# Altium PCB PCM2706_CODEC.PcbDoc
Units mil, origin at the board's own origin, x right, y up, seen from the top; angles counter-clockwise.
Board outline 1377.95 x 1377.95 mil, 2 copper layers (Top Layer, Bottom Layer); 31 components, 22 nets, 104 pads, 40 vias.
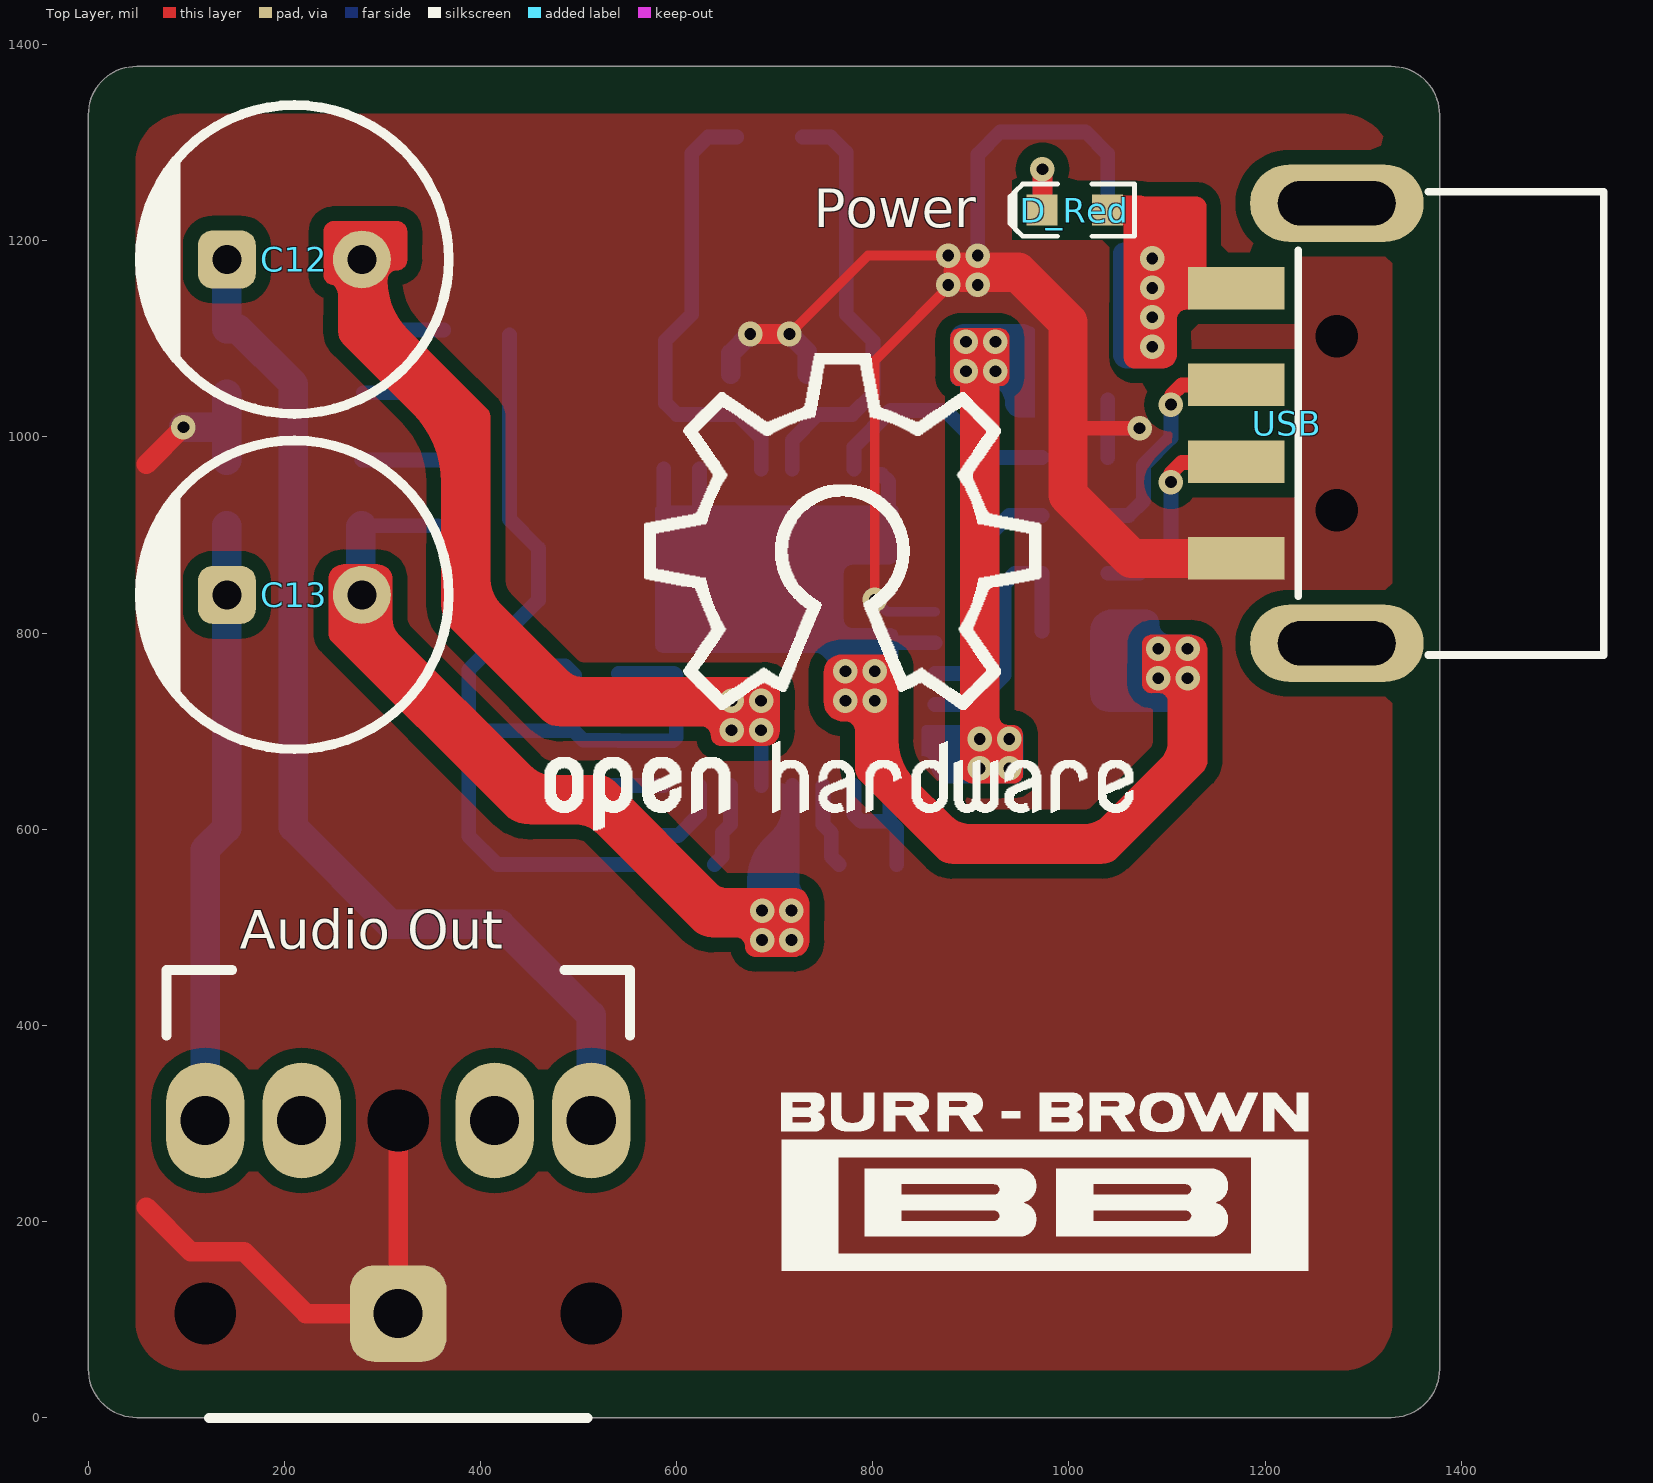
[diagram p0: Top Layer view]
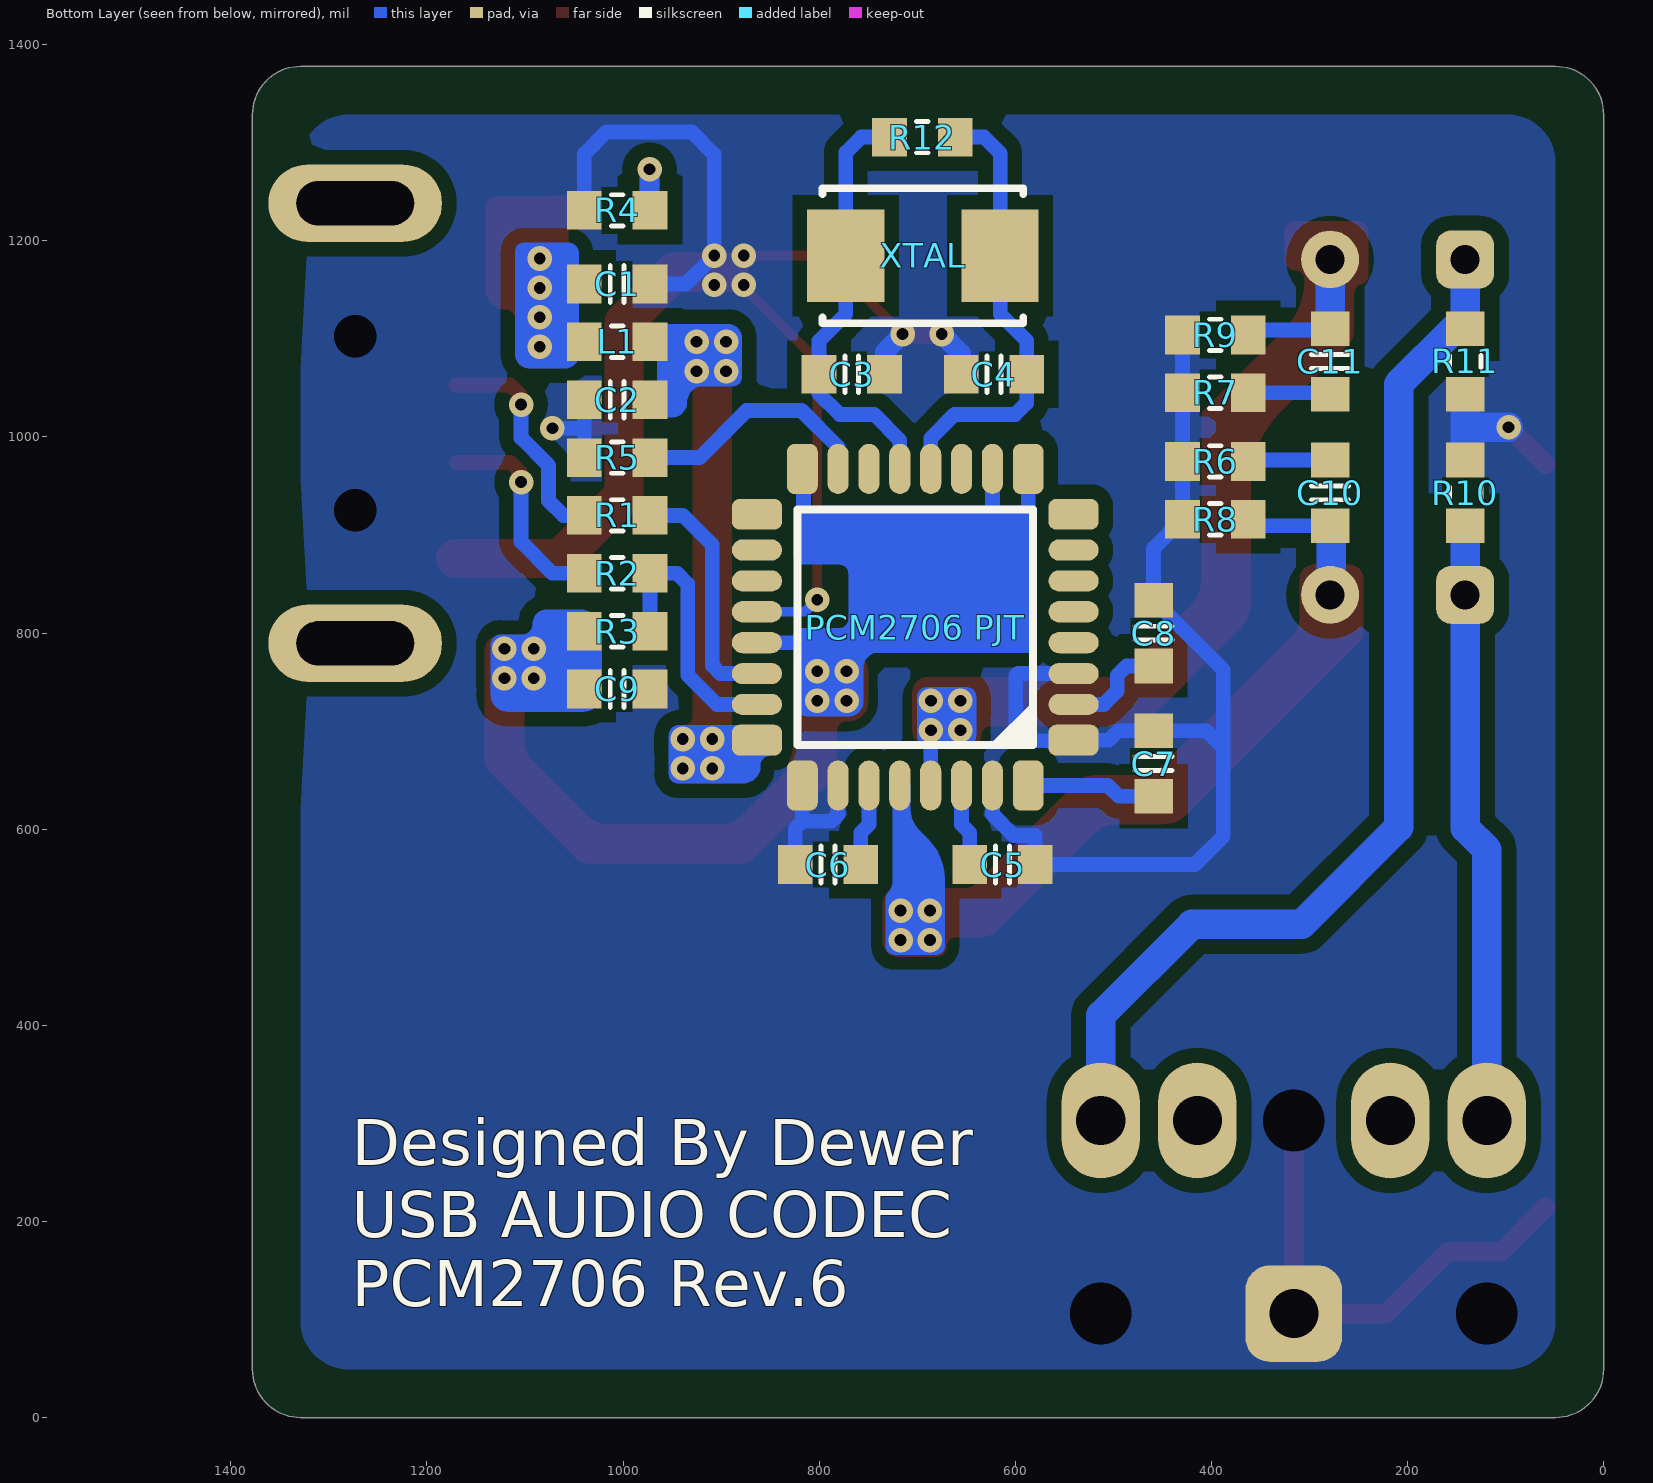
[diagram p1: Bottom Layer view, seen from below]

## Layer stack, top to bottom
Top Layer: signal copper 1.4
Dielectric: dielectric 12.6, FR-4, Dk 4.8
Bottom Layer: signal copper 1.4

## Board outline
1377.95,1328.74 ccw(c1328.74,1328.74) 1328.74,1377.95 49.21,1377.95 ccw(c49.21,1328.74) 0,1328.74 0,49.21 ccw(c49.21,49.21) 49.21,0 1328.74,0 ccw(c1328.74,49.21) 1377.95,49.21

## Design rules (kind name [scope] priority, off if disabled: settings)
Clearance [All] p1: gap=7
PolygonConnect [All] p1: connectstyle=Direct reliefconductorwidth=10 reliefentries=4 polygonreliefangle="90 Angle" airgapwidth=10
RoutingVias [All] p1: holewidth=28 width=50 viastyle="Through Hole" minholewidth=28 minwidth=50 maxholewidth=28 maxwidth=50
SolderMaskExpansion [All] p1: expansion=0
Width [All] p1: maxlimit=40 minlimit=10 preferedwidth=20 minimp=50.000000 maximp=50.000000 favimp=50.000000
28 further rules are at their usual default settings.

## Components (designator, comment, footprint, x,y, rotation, side; value= is the part's Value field where it differs from the comment)
"Audio Out" "Generic 3.5 PhoneJack 5 Pin through-hole" "3.5 PhoneJack 5 Pin" 316,106 r270 top (schematic designator J_Audio_Out)
C1 "Cap_0603" CAP_0603 1006,1156 r0 bottom
C2 "Cap_0603" CAP_0603 1006,1038 r180 bottom
C3 "Cap_0603" CAP_0603 766.75,1063.82 r0 bottom
C4 "Cap_0603" CAP_0603 621.75,1063.82 r180 bottom
C5 "Cap_0603" CAP_0603 613,564 r0 bottom
C6 "Cap_0603" CAP_0603 791,564 r180 bottom
C7 "Cap_0603" CAP_0603 459,667 r270 bottom
C8 "Cap_0603" CAP_0603 459,800 r270 bottom
C9 "Cap_0603" CAP_0603 1006,743 r0 bottom
C10 "Cap_0603" CAP_0603 279,943 r270 bottom
C11 "Cap_0603" CAP_0603 279,1077 r90 bottom
C12 "Capacitor" CAP_ELEC_F3.5_D8_H11.5 279,1181 r180 top
C13 "Capacitor" CAP_ELEC_F3.5_D8_H11.5 279,839 r180 top
D_Red "LED_0603_RED" LED_0603_RED 1005.9,1231.3 r180 top
L1 "Ind_0603" IND_0603 1006,1097 r180 bottom
"PCM2706 PJT" "PCM2706 PJT" TI-S-PQFP-N32 702,806 r0 bottom
R1 "Res_0603" RES_0603 1006,920 r180 bottom
R2 "Res_0603" RES_0603 1006,861 r180 bottom
R3 "Res_0603" RES_0603 1006,802 r180 bottom
R4 "Res_0603" RES_0603 1006,1231 r0 bottom
R5 "Res_0603" RES_0603 1006,979 r0 bottom
R6 "Res_0603" RES_0603 396,975 r0 bottom
R7 "Res_0603" RES_0603 396,1045 r0 bottom
R8 "Res_0603" RES_0603 396,916 r0 bottom
R9 "Res_0603" RES_0603 396,1104 r0 bottom
R10 "Res_0603" RES_0603 141,943 r90 bottom
R11 "Res_0603" RES_0603 141,1077 r270 bottom
R12 "Res_0603" RES_0603 694.75,1305.82 r180 bottom
USB "USB" USB 1379.45,1013.95 r0 top
XTAL "XTAL_5032" XTAL_5032 694.21,1184.82 r0 bottom

## Footprints (in the part's own frame and the unit in brackets; to place one, negate y for a bottom-side part, rotate by r counter-clockwise, add the part's x,y. Pads: shape width x height; smd on the part's side, far side on the other; paste and mask are expansions set on the pad)
"3.5 PhoneJack 5 Pin" [mm] "Generic 3.5 PhoneJack 5 Pin  through-hole"
  round 1 hole 1.6: 0(-5,0) 0(0,5) 0(0,-5)
  oval 3x2.032 hole 1.27: Ring_NC(-5,2.5) Ring_NO(-5,5) Tip_NC(-5,-2.5) Tip_NO(-5,-5)
  rrect50% 2.5x2.5 hole 1.27: Sleeve(0,0)
  silkscreen extent -8.9,-6 2.7,6, body extent -8.48,-6 6.52,6, height 10
CAP_0603 [mm] "Chip Capacitor, Body 1.6x0.8mm, 0603, IPC Medium Density"
  rect 0.9x1 smd: 1(-0.85,0) 2(0.85,0)
  Top Layer pour cut-out: -0.4,0.6 0.4,0.6 0.4,-0.6 -0.4,-0.6
  silkscreen extent -0.18,-0.48 0.18,0.48, body extent -0.85,-0.45 0.85,0.45, height 0.89
CAP_ELEC_F3.5_D8_H11.5 [mm] "CAP_ELEC_F3.5_D8_H11.5"
  round 1.5 hole 0.75: 1(0,0)
  rrect50% 1.5x1.5 hole 0.75: 2(3.5,0)
  silkscreen extent -2.25,-4 5.75,4, body extent -2.27,-4.03 5.78,4.03, height 12.03
IND_0603 [mm] "Chip bead, Body 1.6x0.8mm, 0603, IPC Medium Density"
  rect 0.9x1 smd: 1(-0.85,0) 2(0.85,0)
  Top Layer pour cut-out: -0.4,0.6 0.4,0.6 0.4,-0.6 -0.4,-0.6
  silkscreen extent -0.15,-0.41 0.15,0.41, body extent -0.8,-0.4 0.8,0.4, height 0.79
LED_0603_RED [mm] "Chip Capacitor, 2-Leads, Body 1.6x0.8mm, IPC Medium Density"
  rect 0.8x0.8 smd: 1(-0.85,0) 2(0.85,0)
  Top Layer pour cut-out: -0.5,0.5 0.5,0.5 0.5,-0.5 -0.5,-0.5
  silkscreen extent -1.55,-0.67 1.68,0.67, body extent -0.8,-0.4 0.8,0.4, height 0.75
RES_0603 [mm]
  rect 0.9x1 smd: 1(-0.85,0) 2(0.85,0)
  Top Layer pour cut-out: -0.4,0.6 0.4,0.6 0.4,-0.6 -0.4,-0.6
  silkscreen extent -0.15,-0.41 0.15,0.41, body extent -0.87,-0.47 0.88,0.48, height 0.54
TI-S-PQFP-N32 [mm] "TQFP, 32-Leads, Body 7.00x7.00mm, Pitch 0.80mm, IPC High Density"
  rrect50% 1.3x0.8 smd: 1(-4.1,2.925) 8(-4.1,-2.925) 17(4.1,-2.925) 24(4.1,2.925)
  oval 1.3x0.55 smd: 2(-4.1,2) 3(-4.1,1.2) 4(-4.1,0.4) 5(-4.1,-0.4) 6(-4.1,-1.2) 7(-4.1,-2) 18(4.1,-2) 19(4.1,-1.2) 20(4.1,-0.4) 21(4.1,0.4) 22(4.1,1.2) 23(4.1,2)
  rrect50% 0.8x1.3 smd: 9(-2.925,-4.1) 16(2.925,-4.1) 25(2.925,4.1) 32(-2.925,4.1)
  oval 0.55x1.3 smd: 10(-2,-4.1) 11(-1.2,-4.1) 12(-0.4,-4.1) 13(0.4,-4.1) 14(1.2,-4.1) 15(2,-4.1) 26(2,4.1) 27(1.2,4.1) 28(0.4,4.1) 29(-0.4,4.1) 30(-1.2,4.1) 31(-2,4.1)
  silkscreen extent -3.05,-3.05 3.05,3.05, body extent -4.51,-4.5 4.49,4.5, height 1.6
USB [mm] "Connector; USB1.1, Type A, SM; 4 Position; Right Angle"
  round 0.8 hole 1.1: 0(-2.7,-2.25) 0(-2.7,2.25)
  rect 2.5x1.1 smd: 1(-5.3,3.5) 2(-5.3,1) 3(-5.3,-1) 4(-5.3,-3.5)
  oval 4.5x2 hole 1.143 slot 3.048 at 0 deg: 5(-2.7,-5.7) 6(-2.7,5.7)
  silkscreen extent -3.7,-6 4.21,6, body extent -5.3,-6.3 15,6.31, height 3.15
XTAL_5032 [mm] "Molded Capacitor, 2-Leads, Body 5.0x3.2mm, IPC Medium Density"
  rect 2x2.4 smd: 1(-2,0) 2(2,0)
  silkscreen extent -2.6,-1.75 2.6,1.75, body extent -2.5,-1.6 2.5,1.6, height 1

## Part data
C1 C2 C3 C4 C5 C6 C7 C8 C9 C10 C11: "Capacitor"
C12 C13: library part Cap_ELEC_8*11.5*3.5, "Cap_ELEC_8*11.5*3.5"
D_Red: "LED"
L1: "Inductor"
"PCM2706 PJT": "PCM2706 USB CODEC"
R1 R2 R3 R4 R5 R6 R7 R8 R9 R10 R11 R12: "Resistor"
XTAL: "Crystal Oscillator"

## Via types
v1: diameter 25, hole 12, Top Layer to Bottom Layer, tented both sides, 40 vias

## Nets (pads, with @x,y where several pads share a name; then routed paths per layer and width w, separated by ;. In a path a pad name is that pad's centre, name@x,y a point inside that pad or via, vN(x,y) a via of type N, cw(c..) or ccw(c..) an arc to the next point about the centre after c; other vN are vias at no path point)
5V: C1.2 D_Red.1 L1.1 USB.1 | length 104.1
  Top Layer w30: D_Red.1 1071.7,1231.3 1085,1218 1085,1165
  other v1: 1085,1092 1085,1122 1085,1152 1085,1182
AGND: "Audio Out.0" "Audio Out.Sleeve" "PCM2706 PJT.1" "PCM2706 PJT.3" "PCM2706 PJT.20" "PCM2706 PJT.25" "PCM2706 PJT.26" "PCM2706 PJT.31" C1.1 C2.1 C3.1 C4.1 C5.1 C6.1 C7.1 C8.1 C9.1 R4.2 R5.2 R6.2 R7.2 R8.2 R9.2 R10.2 R11.2 USB.0 USB.4 | length 3856.1
  Top Layer w10: v1(715,1105) 795,1185 v1(877,1185) ; v1(802,834) 802,1078 892,1168
  Top Layer w15: 999,1011 1001,1009 v1(1072,1009)
  Top Layer w20: 59.06,214.57 104.33,169.29 158.71,169.29 222,106 316,106 316,302.85 ; 59.06,972.06 v1(97,1010) ; v1(675,1105) v1(715,1105)
  Top Layer w40: 892,1168 948,1168 999,1117 999,1011 999,941 1063.84,876.16 USB.4
  Bottom Layer w10: v1(802,834) 814.25,821.75 863.42,821.75
  Bottom Layer w15: R9.2 R7.2 R6.2 R8.2 459,886.46 C8.1 388,762.46 388,683 ; 540.58,758.76 596.56,758.76 cw(c596.56,755.91) 599.41,755.91 599.41,694.95 cw(c594.72,694.95) 594.72,690.26 540.58,690.26 540.58,690.84 504.62,690.84 495,700.46 C7.1 405.46,700.46 388,683 ; 623.26,644.58 623.26,615.26 601.54,593.54 579.54,593.54 C5.1 417,564 388,593 388,683 ; 780.74,644.58 780.74,615.26 787.83,608.17 817.16,608.17 817.16,644.58 ; 818.83,606.49 824.46,600.86 C6.1 ; C1.1 936,1156 v1(907,1185) 907,1288 930.02,1311.02 1016.98,1311.02 1039.46,1288.54 R4.2 ; R5.2 C2.1 ; 1040.46,1009 v1(1072,1009)
  Bottom Layer w20: C4.1 655.21,1085.21 v1(675,1105) ; v1(715,1105) 733.28,1086.72 C3.1
  Bottom Layer w30: v1(97,1010) 141,1010 ; R10.2 141,1010 ; R11.2 141,1010
  other v1: 877,1155 907,1155
D+: "PCM2706 PJT.23" R2.2 R3.2 | length 278
  Bottom Layer w15: 863.42,727.26 904.26,727.26 934,757 934,850 945,861 R2.2 R3.2
D-: "PCM2706 PJT.22" R1.2 | length 248
  Bottom Layer w15: 863.42,758.76 900.76,758.76 909,767 909,890 939,920 R1.2
DT: "PCM2706 PJT.15" R5.1 | length 249.4
  Bottom Layer w15: 780.74,967.42 780.74,989.74 818,1027 874,1027 922,979 R5.1
NetC10_1: C10.1 R6.1 | length 82.1
  Bottom Layer w15: C10.1 R6.1@361.07,976.46
NetC11_1: C11.1 R7.1 | length 82.1
  Bottom Layer w15: C11.1@280.46,1045 R7.1
NetD_Red_2: D_Red.2 R4.1 | length 84.2
  Top Layer w20: D_Red.2@973,1231.3 v1(973,1273)
  Bottom Layer w15: R4.1 R4.1@973,1231
  Bottom Layer w20: R4.1@973,1231 v1(973,1273)
NetR1_1: R1.1 USB.2 | length 230
  Top Layer w15: v1@1105,1033 1105,1043 1115,1053 USB.2@1170.46,1053
  Bottom Layer w15: R1.1 1061,920 1076,935 1076,971 1104,999 v1@1104,1031
  other v1: 1104,1033
NetR2_1: R2.1 USB.3 | length 218.6
  Top Layer w15: v1(1104,954) 1104,963 1115,974 USB.3@1170.2,974
  Bottom Layer w15: R2.1 1072,861 1104,893 v1(1104,954)
PHONEL: "Audio Out.Tip_NO" C13.2 R10.1 | length 697.8
  Bottom Layer w30: 111,311 119.15,302.85 119.15,579.15 141,601 R10.1 ; C13.2 R10.1@141.2,909.54
PHONER: "Audio Out.Ring_NO" C12.2 R11.1 | length 1104.4
  Bottom Layer w30: R11.1 152.33,1110.46 209,1053.8 209,602 308,503 420,503 512.85,410.15 512.85,302.85 ; R11.1@141,1110.73 C12.2@141,1181.27
VBUS: "PCM2706 PJT.24" C2.2 L1.2 | length 375
  Top Layer w40: v1(909,692) 909,1067
  other v1: 909,662 939,662 939,692 895,1067 925,1067 895,1097 925,1097
VCCL: "PCM2706 PJT.27" C6.2 | length 87.3
  Bottom Layer w15: 749.24,644.58 749.24,604.76 757.54,596.46 757.54,572 C6.2@765.54,564
VCCP: "PCM2706 PJT.2" C8.2 | length 107.2
  Bottom Layer w15: C8.2 486.46,766.54 496,757 496,741 509.74,727.26 540.58,727.26
VCCR: "PCM2706 PJT.30" C5.2 | length 87.3
  Bottom Layer w15: C5.2@638.46,564 646.46,572 646.46,596.46 654.76,604.76 654.76,644.58
VCOM: "PCM2706 PJT.32" C7.2 | length 132.4
  Bottom Layer w15: C7.2 494.54,633.54 505.58,644.58 586.84,644.58
VDD: "PCM2706 PJT.9" "PCM2706 PJT.10" "PCM2706 PJT.16" "PCM2706 PJT.21" C9.2 R3.1 | length 1221.9
  Top Layer w40: v1(802,731) 802,663 880,585 1035,585 1121,671 v1(1121,754)
  Bottom Layer w15: 586.84,967.42 586.84,918.16 634,871 723,871 746,894 804,894 816,906 816,954.63 809,961.63 ; 623.26,882 623.26,967.42 ; 705,871 705,810 724.75,790.25 863.42,790.25
  other v1: 772,731 1091,754 772,761 802,761 1091,784 1121,784
VOUTL: "PCM2706 PJT.28" C10.2 C13.1 R8.1 | length 841.6
  Top Layer w40: C13.1 279,799 447,631 519,631 633,517 v1(687,517)
  Bottom Layer w15: C10.2 R8.1@356.07,909.54 ; v1(717,517) ccw(c717,517.75) v1@717.75,517.75 ; v1@717.75,517 717.75,644.58
  Bottom Layer w30: C13.1@278,839 278,908.54 C10.2
  other v1: 687,487 717,487
VOUTR: "PCM2706 PJT.29" C11.2 C12.1 R9.1 | length 916.3
  Top Layer w40: C12.1 279,1121 386,1014 386,832 487,731 v1(656,731)
  Bottom Layer w15: C11.2 280.46,1109 R9.1@362.54,1109 ; 686.25,644.58 v1@686.25,701
  Bottom Layer w30: C11.2 C12.1
  other v1: 656,701 686,701 686,731
XTI: "PCM2706 PJT.12" C4.2 R12.2 XTAL.1 | length 462.8
  Bottom Layer w15: R12.2 631.82,1305.82 615.47,1289.47 XTAL.1 615.47,1125.19 588.28,1098 C4.2 588.28,1034.72 600,1023 662,1023 686.25,998.75 686.25,967.42
XTO: "PCM2706 PJT.13" C3.2 R12.1 XTAL.2 | length 439.9
  Bottom Layer w15: 717.75,967.42 717.75,996.75 744,1023 779,1023 800.21,1044.21 C3.2 800.21,1097.79 772.95,1125.05 XTAL.2 772.95,1290.05 757.18,1305.82 R12.1
pads on no net: "Audio Out.Ring_NC" "Audio Out.Tip_NC" "PCM2706 PJT.4" "PCM2706 PJT.5" "PCM2706 PJT.6" "PCM2706 PJT.7" "PCM2706 PJT.8" "PCM2706 PJT.11" "PCM2706 PJT.14" "PCM2706 PJT.17" "PCM2706 PJT.18" "PCM2706 PJT.19" USB.5 USB.6

## Polygon pours and split planes (outlines as drawn)
AGND on Top Layer "Bottom Layer-GND" (solid, remove dead copper, pour order 22): 98.43,1329.72 ccw(c98.43,1279.53) 48.23,1279.53 48.23,98.43 ccw(c98.43,98.43) 98.43,48.23 1279.53,48.23 ccw(c1279.53,98.43) 1329.72,98.43 1329.72,1276.57 ccw(c1276.57,1276.57) 1276.57,1329.72
AGND on Bottom Layer "Bottom Layer-GND" (solid, remove dead copper, pour order 24): 98.43,49.21 cw(c98.43,98.43) 49.21,98.43 49.21,1279.53 cw(c98.43,1279.53) 98.43,1328.74 1279.53,1328.74 cw(c1279.53,1279.53) 1328.74,1279.53 1328.74,98.43 cw(c1279.53,98.43) 1279.53,49.21

## Other copper
Top Layer:
  region net VOUTL: 720,470 ccw(c720,485) 735,485 735,525 ccw(c720,525) 720,540 650,540 cw(c650,552.07) 641.46,543.54 537.07,647.93 ccw(c520,630.86) 520,655 474.14,655 cw(c474.14,689.14) 450,665 317.07,797.93 cw(c334.14,815) 310,815 310,855 ccw(c295,855) 295,870 260,870 ccw(c260,855) 245,855 245,799 ccw(c254.66,799) 247.83,792.17 424.39,615.61 ccw(c450,641.21) 450,605 495.86,605 cw(c495.86,570.86) 520,595 617.93,497.07 ccw(c635,514.14) 635,490 660,490 cw(c660,480) 670,480 ccw(c680,480) 680,470
  region net VOUTR: 690,685 ccw(c690,700) 705,700 705,740 ccw(c690,740) 690,755 505,755 cw(c505,779.14) 487.93,762.07 420.61,829.39 cw(c446.21,855) 410,855 410,1020 ccw(c397.93,1020) 406.46,1028.54 326.21,1108.79 cw(c377.43,1160) 305,1160 cw(c315,1160) 315,1170 ccw(c315,1180) 325,1180 325,1210 ccw(c315,1210) 315,1220 250,1220 ccw(c250,1210) 240,1210 240,1165 ccw(c250,1165) 250,1155 cw(c237.93,1142.93) 255,1142.93 255,1107.07 ccw(c272.07,1107.07) 260,1095 330.71,1024.29 cw(c260,953.58) 360,953.58 360,829.14 ccw(c394.14,829.14) 370,805 462.93,712.07 ccw(c480,729.14) 480,705 625,705 cw(c625,695) 635,695 ccw(c645,695) 645,685
  region net VDD: 1092,739.09 1141,739 1141,782.2 ccw(c1125,782.2) 1125,798.2 1083.05,798.2 ccw(c1083.05,789.56) 1074.8,789.56 1074.8,748.02 ccw(c1084,748.02) 1084,738.82
  region net VDD: 826,693 826,691.04 ccw(c884.04,691.04) 843,650 879.51,613.49 ccw(c900,633.97) 900,605 1015.69,605 ccw(c1015.69,632.31) 1035,613 1093.22,671.22 ccw(c1074.44,690) 1101,690 1101,730 ccw(c1092,730) 1092,739 1084,739 cw(c1084,748) 1075,748 1075,788 cw(c1085,788) 1085,798 1125,798 cw(c1125,788) 1135,788 1135,782.07 ccw(c1152.07,782.07) 1140,770 cw(c1137.59,767.59) 1141,767.59 1141,670.07 cw(c1123.93,670.07) 1136,658 1049.36,571.36 cw(c1034,586.73) 1034,565 880.49,565 cw(c880.49,585.49) 866,571 787.66,649.34 cw(c801.31,663) 782,663 782,679.53 cw(c801.24,679.53) 787.63,693.13
  region net VDD: 826,765 ccw(c813,765) 813,778 768,778 ccw(c768,760) 750,760 750,730 ccw(c770,730) 770,710 772,710 cw(c772,700) 782,700 ccw(c789,700) 789,693 826,693
  region net 5V: 1095,1070 ccw(c1095,1085) 1110,1085 1110,1120 cw(c1120,1120) 1120,1130 ccw(c1120,1150) 1140,1150 1140,1235 ccw(c1130,1235) 1130,1245 1070,1245 ccw(c1070,1231) 1056,1231 1056,1081 ccw(c1067,1081) 1067,1070
  region net VBUS: 943.1,706 cw(c943.1,696) 953.1,696 953.1,656 cw(c944.1,656) 944.1,647 902.1,647 cw(c902.1,656) 893.1,656 893.1,696 cw(c903.1,696) 903.1,706
  region net VBUS: 929.1,1111 cw(c929.1,1101) 939.1,1101 939.1,1061 cw(c930.1,1061) 930.1,1052 888.1,1052 cw(c888.1,1061) 879.1,1061 879.1,1101 cw(c889.1,1101) 889.1,1111
  region net VBUS: 931,706 901.15,705.81 889.34,694 889,694 889,659.92 ccw(c902.1,659.92) 902.1,646.82 931,646.82
  region net VBUS: 943.1,706.2 937.8,706.2 cw(c937.8,715) 929,715 922,715 923.1,706.1
Bottom Layer:
  region net VDD: 1105,798.1 1103.9,798.1 cw(c1103.9,810) 1092,810 ccw(c1078,810) 1078,824 1043.75,824 ccw(c1043.75,802) 1021.75,802 1021.75,738.25 ccw(c1040,738.25) 1040,720 1118,720 ccw(c1118,736.83) 1134.83,736.83 1134.83,788.37 ccw(c1125,788.37) 1125,798.2
  region net VDD: 826,730 cw(c811,730) 811,715 770,715 cw(c770,730) 755,730 755,765 ccw(c740,765) 740,780 804,780 826,786
  region net VDD: 1125,798 cw(c1125,788) 1135,788 1135,748 cw(c1126,748) 1126,739 1084,739 cw(c1084,748) 1075,748 1075,788 cw(c1085,788) 1085,798
  region net VDD: 826,926 ccw(c822,926) 822,930 582,930 ccw(c582,926) 578,926 578,788 ccw(c586,788) 586,780 820,780 ccw(c820,786) 826,786 826,797 ccw(c818,797) 818,805 780,805 cw(c780,815) 770,815 770,860 cw(c780,860) 780,870 816,870 ccw(c816,880) 826,880
  region net 5V: 1095,1070 ccw(c1095,1085) 1110,1085 1110,1189 ccw(c1101,1189) 1101,1198 1056,1198 ccw(c1056,1187) 1045,1187 1045,1084 ccw(c1059,1084) 1059,1070
  region net VOUTR: 690,745 cw(c690,735) 700,735 700,695 cw(c691,695) 691,686 649,686 cw(c649,695) 640,695 640,735 cw(c650,735) 650,745
  region net VOUTL: 722,531 cw(c722,521) 732,521 732,481 cw(c723,481) 723,472 681,472 cw(c681,481) 672,481 672,521 cw(c682,521) 682,531
  region net VBUS: 929,1111 cw(c929,1101) 939,1101 939,1061 cw(c930,1061) 930,1052 888,1052 cw(c888,1061) 879,1061 879,1101 cw(c889,1101) 889,1111
  region net VBUS: 943,706 cw(c943,696) 953,696 953,656 cw(c944,656) 944,647 902,647 cw(c902,656) 893,656 893,696 cw(c903,696) 903,706
  region net VBUS: 850,675 cw(c850,665) 860,665 860,664 ccw(c877.18,664) 877.18,646.82 944,646.82 ccw(c944,656.02) 953.2,656.02 953.2,696 ccw(c943.2,696) 943.2,706 854,706 ccw(c854,702) 850,702
  region net VBUS: 965,1110 ccw(c952.93,1097.93) 952.93,1115 892.8,1115 ccw(c892.8,1101) 878.8,1101 878.8,1061.02 ccw(c888,1061.02) 888,1051.82 918.18,1051.82 cw(c918.18,1035) 935,1035 ccw(c950,1035) 950,1020 965,1020
  region net VOUTL: 707,647 707,621 cw(c675.62,621) 697.81,598.81 689,590 ccw(c730.51,548.49) 671.8,548.49 671.8,521 672,521 672,480.82 ccw(c681,480.82) 681,471.82 723,471.82 ccw(c723,481) 732.18,481 732.1,521 732.1,529.94 ccw(c724.94,529.94) 730,535 cw(c742.07,547.07) 725,547.07 725,644.58 717.75,644.58

## Silkscreen, mask and mechanical layers (free items; w line width, h text height)
Top Overlay:
  drawing of 6043 lines, arcs and shapes, not listed
  text "Power" at 740,1214 h39.37
Bottom Overlay:
  text "Designed By Dewer" at 1276.65,242 h80
  text "USB AUDIO CODEC" at 1276.65,168.4 h80
  text "PCM2706 Rev.6" at 1276.65,98.1 h80
Mechanical 13:
  lines w5: 0,49.21 0,1328.74 ; 49.21,0 1328.74,0 ; 49.21,1377.95 1328.74,1377.95 ; 1377.95,49.21 1377.95,1328.74 ; 1328.74,1377.95 1328.74,1377.95